# Altium PCB lipo recharging board.PcbDoc
Units mil, origin at the board's own origin, x right, y up, seen from the top; angles counter-clockwise.
Board outline 6000 x 4000 mil, 4 copper layers (Top Layer, Layer 1, Layer 2, Bottom Layer), stack 23.756 mil thick; 67 components, 46 nets, 223 pads, 30 vias.
Unrouted connection lines stored in the file: 2.
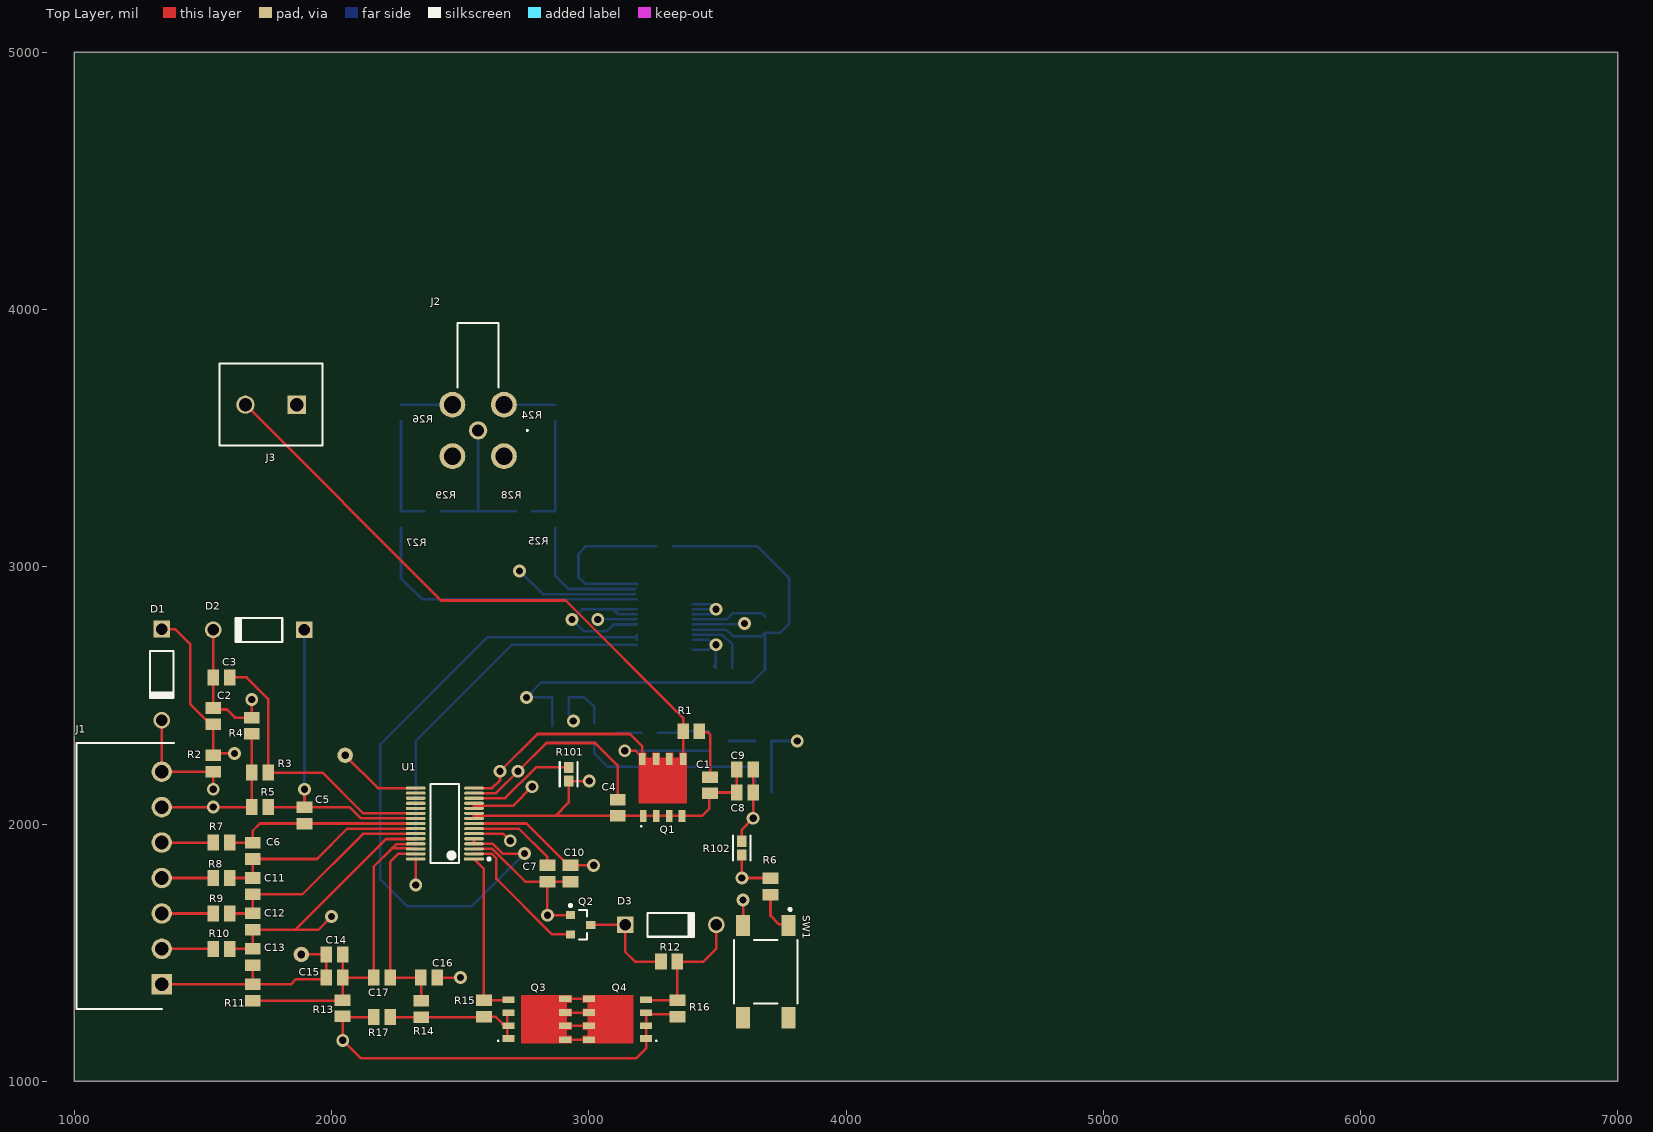
[diagram p0: Top Layer view]
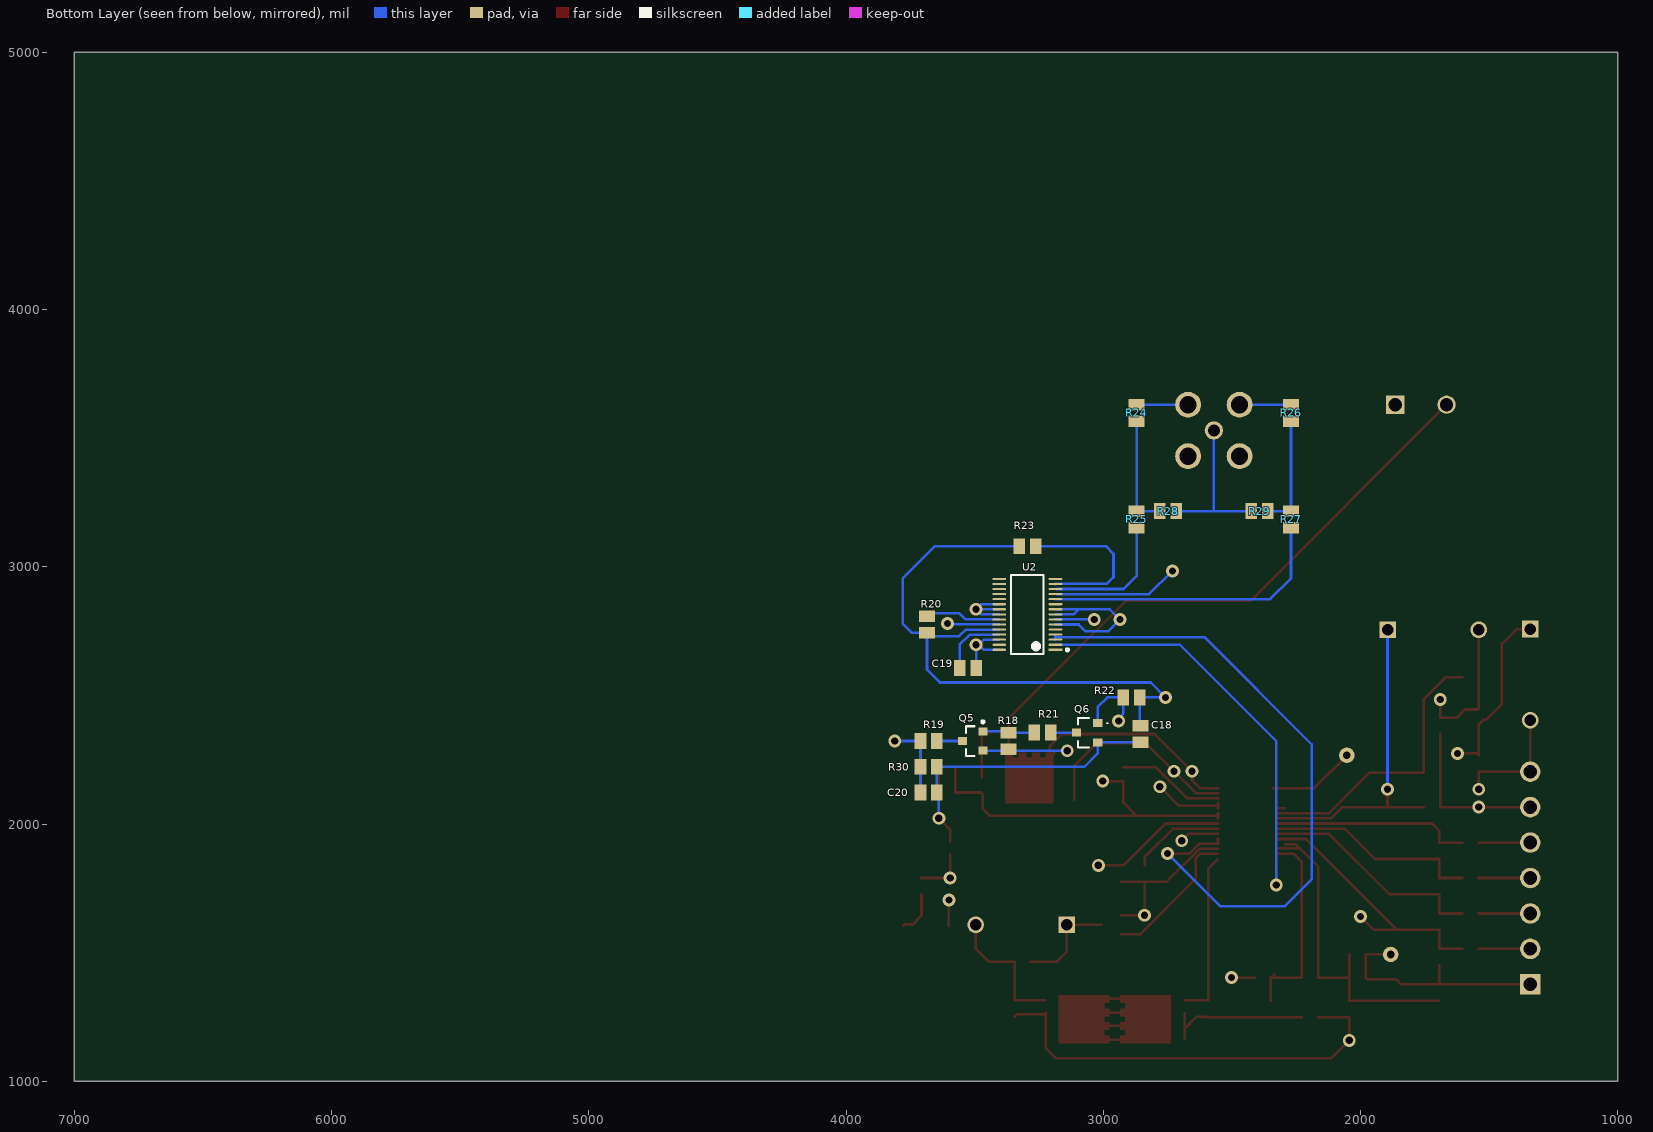
[diagram p1: Bottom Layer view, seen from below]
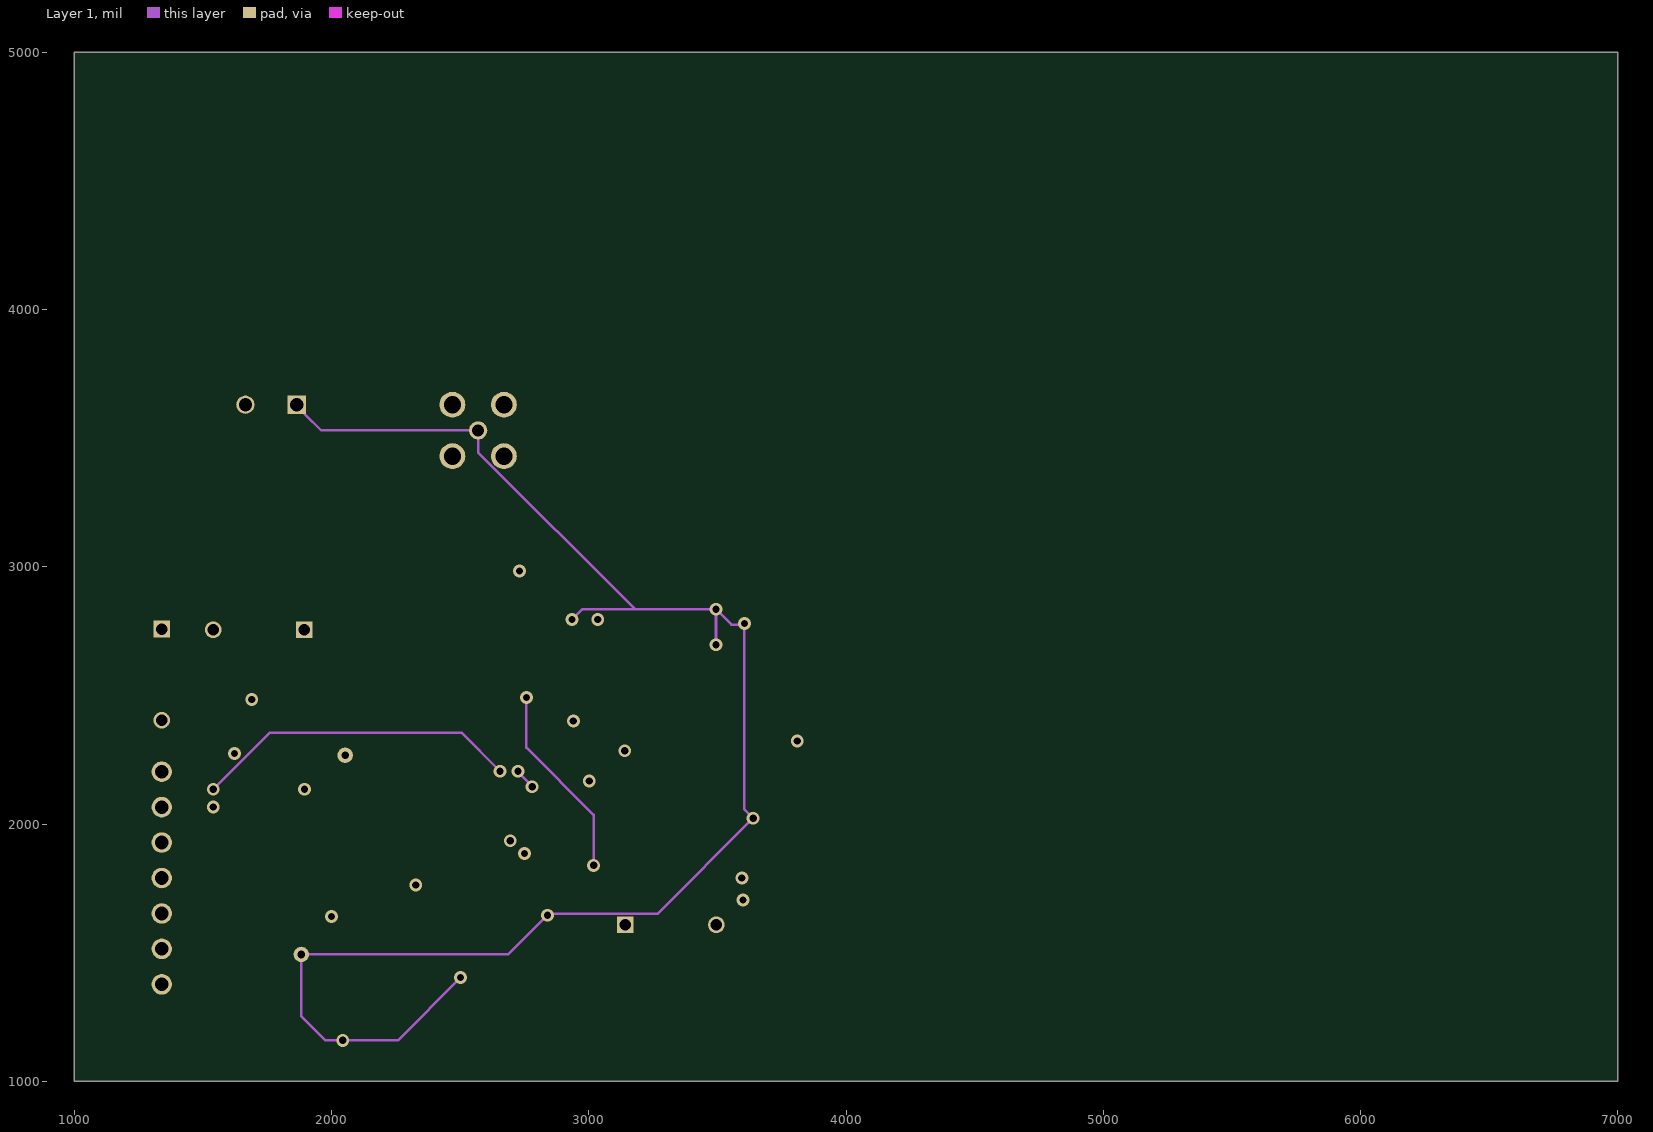
[diagram p2: Layer 1]
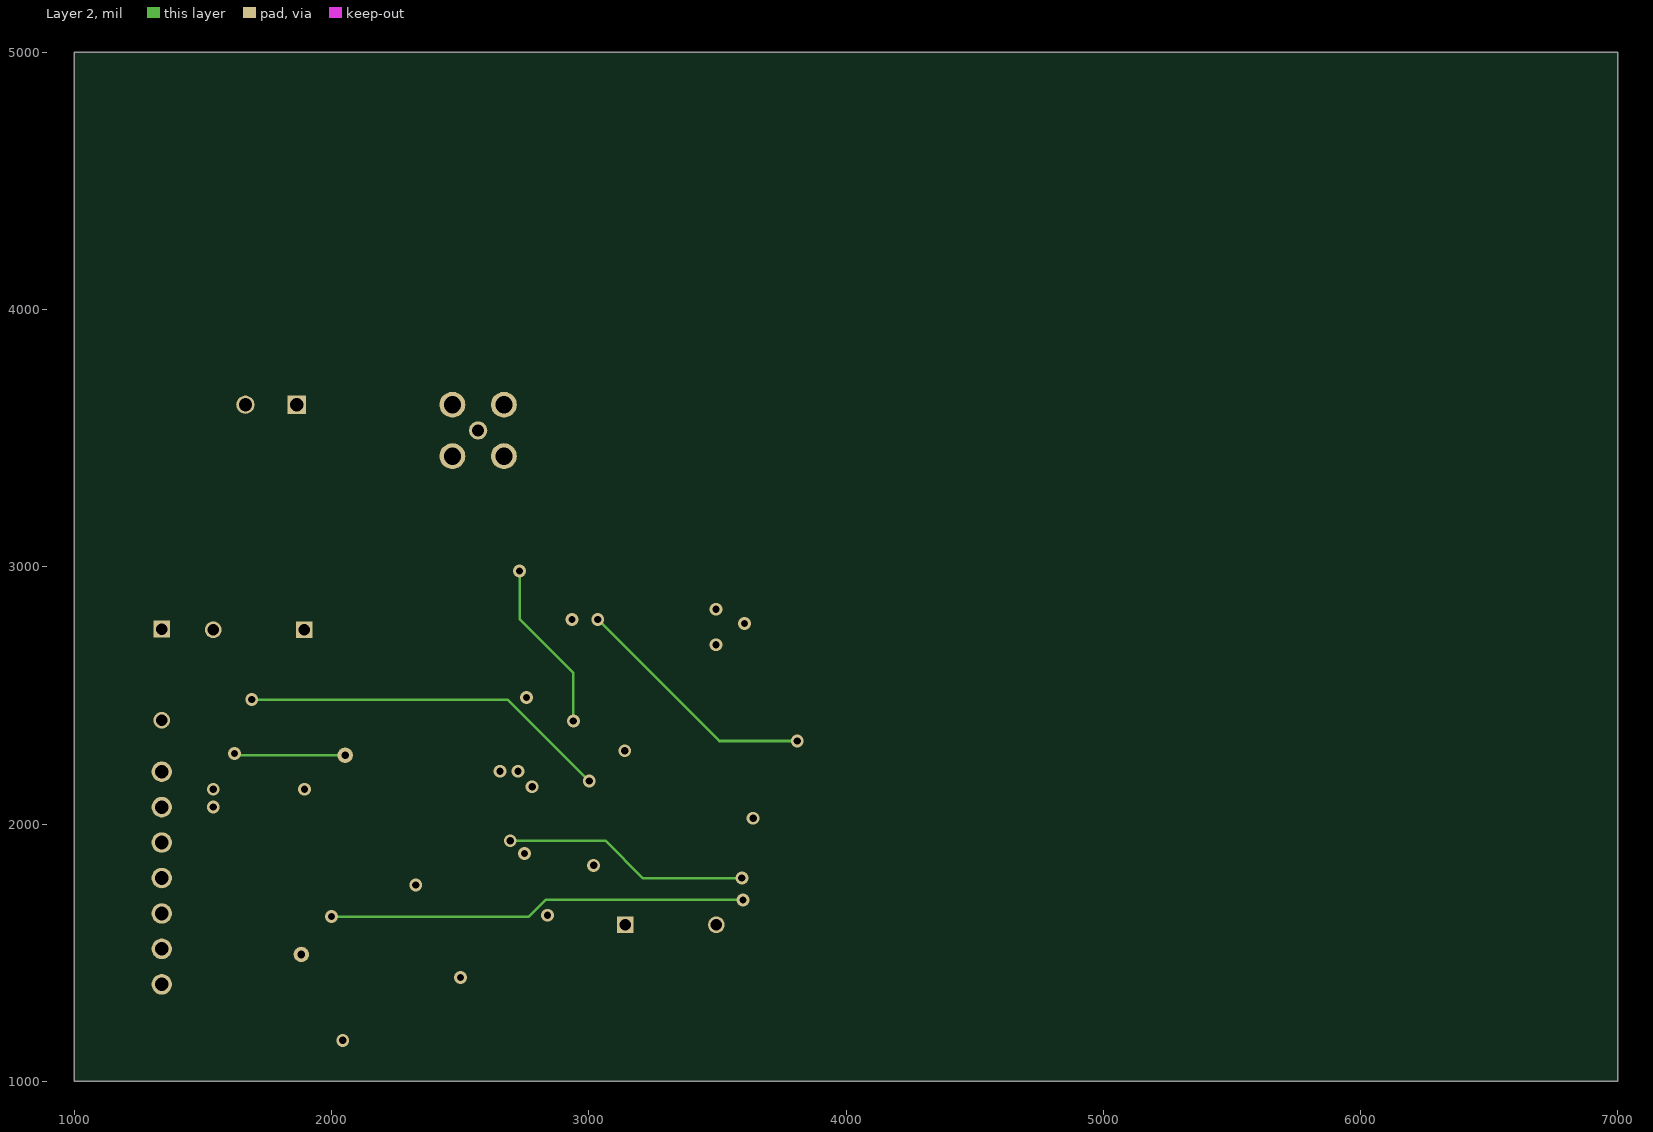
[diagram p3: Layer 2]

## Layer stack, top to bottom
Top Solder: solder mask 0.4, Solder Resist, Dk 3.5
Top Layer: signal copper 1.4
Dielectric 2: prepreg 2.8, PP-006, Dk 4.1
Layer 1: signal copper 1.378
Dielectric 1: dielectric 12.6, FR-4, Dk 4.8
Layer 2: signal copper 1.378
Dielectric 3: prepreg 2.8, PP-006, Dk 4.1
Bottom Layer: signal copper 1.4
Bottom Solder: solder mask 0.4, Solder Resist, Dk 3.5

## Board outline
1000,1000 7000,1000 7000,5000 1000,5000

## Design rules (kind name [scope] priority, off if disabled: settings)
Clearance [All] p1: gap=5 ignorepadtopadclearanceinfootprint=TRUE
PolygonConnect [All] p1: connectstyle=Relief reliefconductorwidth=10 reliefentries=4 polygonreliefangle="90 Angle" airgapwidth=10
RoutingVias [All] p1: holewidth=28 width=50 viastyle="Through Hole" minholewidth=28 minwidth=50 maxholewidth=28 maxwidth=50
SolderMaskExpansion [All] p1: expansion=4 istentingtop=FALSE
Width [All] p1: maxlimit=10 minlimit=10 preferedwidth=10
30 further rules are at their usual default settings.

## Classes and differential pairs
component class "LiPo Recharging Circuit Schematic v.20": C18 C19 C20 J2 Q5 Q6 R18 R19 R20 R21 R22 R23 R24 R25 R26 R27 R28 R29 R30 U2
component class "battery monitor v2.0": C1 C2 C3 C4 C5 C6 C7 C8 C9 C10 C11 C12 C13 C14 C15 C16 C17 D1 D2 D3 D? J1 Q1 Q2 Q3 Q4 R1 R2 R3 R4 R5 R6 R7 R8 R9 R10 R11 R12 R13 R14 R15 R16 R17 RT1 RT2 SW1 U1

## Components (designator, comment, footprint, x,y, rotation, side; value= is the part's Value field where it differs from the comment)
C1 "Capacitor" CAPC2012X145N 3471.56,2150.67 r90 top value=2.2uF
C2 "Capacitor" CAPC2012X145N 1540,2419.06 r270 top value=1uF
C3 "Capacitor" CAPC2012X145N 1571.89,2570 r180 top value=1uF
C4 "Capacitor" CAPC2012X145N 3112.56,2063.23 r90 top value=1uF
C5 "Capacitor" CAPC2012X145N 1895,2033.7 r90 top value=1uF
C6 "Capacitor" CAPC2012X145N 1693.78,1895.91 r90 top value=1uF
C7 "Capacitor" CAPC2012X145N 2839.06,1807.4 r90 top value=1uF
C8 "Capacitor" CAPC2012X145N 3607.23,2122.56 r180 top value=1uF
C9 "Capacitor" CAPC2012X145N 3607.23,2212.56 r180 top value=2.2uF
C10 "Capacitor" CAPC2012X145N 2929.06,1807.4 r90 top value=4.7uF
C11 "Capacitor" CAPC2012X145N 1693.78,1758.11 r90 top value=1uF
C12 "Capacitor" CAPC2012X145N 1693.78,1620.32 r90 top value=1uF
C13 "Capacitor" CAPC2012X145N 1693.78,1482.52 r90 top value=1uF
C14 "Capacitor" CAPC2012X145N 2011.89,1492.83 r180 top value=1uF
C15 "Capacitor" CAPC2012X145N 2011.89,1402.83 r180 top value=0.1uF
C16 "Capacitor" CAPC2012X145N 2379.45,1402.83 r180 top value=0.1uF
C17 "Capacitor" CAPC2012X145N 2195.67,1402.83 r180 top value=0.1uF
C18 "Capacitor" CAPC2012X145N 2855.73,2349.43 r90 bottom value=0.1uF
C19 "Capacitor" CAPC2012X145N 3526.16,2606.89 r0 bottom value=0.1uF
C20 "Capacitor" CAPC2012X145N 3678.49,2122.56 r0 bottom value=3300pF
D1 "1N4001-T" DIOD-DO-41-P-2_V 1340,2580.55 r270 top
D2 "1N4001-T" DIOD-DO-41-P-2_V 1717.17,2754.88 r180 top
D3 "1N4001-T" DIOD-DO-41-P-2_V 3318.77,1608.11 r0 top
J1 "39502-1007" SHDRRA7W80P0X350_1X7_2590X920X730P 1340,1376.61 r90 top
J2 "CONSMB002-G" CONSMB002G 2570,3530 r0 top
J3 "Comment" PHOE-1729128-2_V 1765,3630 r180 top
Q1 "BSC0904NSI" INF-PG-TDSON-8-1_V#1 3287.56,2142.56 r0 top
Q2 "BVSS84LT1G" ONSC-SOT-23-3-318-08_V#1 2968.43,1608.11 r0 top
Q3 "BSC0904NSI" INF-PG-TDSON-8-1_V#2 2798.78,1241.05 r90 top
Q4 "BSC0904NSI" INF-PG-TDSON-8-1_V#1 3111.54,1241.06 r90 top
Q5 "BVSS84LT1G" ONSC-SOT-23-3-318-08_V#2 3507.23,2322.56 r0 bottom
Q6 "SSM3K376R_LF" SSM3K376RLF 3062.74,2354.94 r270 bottom
R1 "Resistor" CAPC2012X145N 3398.45,2360.67 r0 top value=10K
R2 "Resistor" CAPC2012X145N 1540,2235.28 r270 top value=100
R3 "Resistor" CAPC2012X145N 1721.89,2200 r180 top value=100
R4 "Resistor" CAPC2012X145N 1690,2381.89 r90 top value=10K
R5 "Resistor" CAPC2012X145N 1721.89,2065.59 r180 top value=100
R6 "Resistor" CAPC2012X145N 3706.38,1756.89 r90 top value=10K
R7 "Resistor" CAPC2012X145N 1571.89,1927.8 r180 top value=100
R8 "Resistor" CAPC2012X145N 1571.89,1790 r180 top value=100
R9 "Resistor" CAPC2012X145N 1571.89,1652.2 r180 top value=100
R10 "Resistor" CAPC2012X145N 1571.89,1514.41 r180 top value=100
R11 "Resistor" CAPC2012X145N 1693.78,1344.72 r90 top value=100
R12 "Resistor" CAPC2012X145N 3312.72,1465 r180 top value=1M
R13 "Resistor" CAPC2012X145N 2042.56,1283.78 r270 top value=100
R14 "Resistor" CAPC2012X145N 2348.78,1280.94 r270 top value=100
R15 "Resistor" CAPC2012X145N 2592.56,1282.16 r90 top value=1M
R16 "Resistor" CAPC2012X145N 3344.61,1283.11 r90 top value=1M
R17 "Resistor" CAPC2012X145N 2195.67,1249.05 r0 top value=0.001
R18 "Resistor" CAPC2012X145N 3367.86,2323.05 r270 bottom value=100K
R19 "Resistor" CAPC2012X145N 3678.49,2322.56 r180 bottom value=300k
R20 "Resistor" CAPC2012X145N 3685,2775 r270 bottom value=100K
R21 "Resistor" CAPC2012X145N 3235.97,2354.94 r0 bottom value=100K
R22 "Resistor" CAPC2012X145N 2889.51,2492.34 r180 bottom value=1M
R23 "Resistor" CAPC2012X145N 3294.37,3079.61 r0 bottom value=221k
R24 "Resistor" CAPC2012X145N 2870,3598.11 r90 bottom value=100
R25 "Resistor" CAPC2012X145N 2870,3184.33 r90 bottom value=100
R26 "Resistor" CAPC2012X145N 2270,3598.11 r90 bottom value=100
R27 "Resistor" CAPC2012X145N 2270,3184.33 r90 bottom value=100
R28 "Resistor" CAPC2012X145N 2748.11,3216.22 r180 bottom value=1M
R29 "Resistor" CAPC2012X145N 2391.89,3216.22 r180 bottom value=1M
R30 "Resistor" CAPC2012X145N 3678.49,2222.56 r0 bottom value=13.7k
R101 "10k" FP-NCU18-0_15-IPC_B 2921.77,2193.38 r270 top
R102 "10k" FP-NCU18-0_15-IPC_B 3595,1906.62 r270 top
SW1 "4-1437565-1" FP-4-1437565-1-MFG 3688.19,1425.87 r270 top
U1 "BQ7693000DBT" FP-DBT0030A-IPC_A 2440.62,2001.81 r180 top
U2 "BQ78350DBT-R1" FP-DBT0030A-IPC_C 3295,2815 r0 bottom

## Footprints (in the part's own frame and the unit in brackets; to place one, negate y for a bottom-side part, rotate by r counter-clockwise, add the part's x,y. Pads: shape width x height; smd on the part's side, far side on the other; paste and mask are expansions set on the pad)
CAPC2012X145N [mm]
  rect 1.14x1.57 smd: 1(-0.81,0) 2(0.81,0)
CONSMB002G [mm]
  round 1.8 hole 1.2: 1(0,0)
  round 2.55 hole 1.7: 2(2.54,2.54) 3(-2.54,2.54) 4(-2.54,-2.54) 5(2.54,-2.54)
  silkscreen extent -2.03,-0.05 4.9,10.6
DIOD-DO-41-P-2_V [mm] "2-Leads, Axial Lead, Body 4.635x2.36mm, Pin Spacing 9mm"
  rect 1.65x1.65 hole 1.15: 1(-4.5,0)
  round 1.65 hole 1.15: 2(4.5,0)
  silkscreen extent -2.32,-1.18 2.32,1.18, body extent -4.93,-1.18 4.93,1.18, height 2.35
FP-4-1437565-1-MFG [mm]
  rect 2.1x1.38 smd paste+0 mask+0: 1(-4.55,2.24) 2(4.55,2.24) 3(-4.55,-2.24) 4(4.55,-2.24)
  silkscreen extent -6.27,-3.15 3.15,3.15
FP-DBT0030A-IPC_A [mm]
  rect 1.955x0.312 smd paste+0 mask+0: 1(-2.875,3.5)
  rrect100% 1.955x0.312 smd paste+0 mask+0: 2(-2.875,3) 3(-2.875,2.5) 4(-2.875,2) 5(-2.875,1.5) 6(-2.875,1) 7(-2.875,0.5) 8(-2.875,0) 9(-2.875,-0.5) 10(-2.875,-1) 11(-2.875,-1.5) 12(-2.875,-2) 13(-2.875,-2.5) 14(-2.875,-3) 15(-2.875,-3.5) 16(2.875,-3.5) 17(2.875,-3) 18(2.875,-2.5) 19(2.875,-2) 20(2.875,-1.5) 21(2.875,-1) 22(2.875,-0.5) 23(2.875,0) 24(2.875,0.5) 25(2.875,1) 26(2.875,1.5) 27(2.875,2) 28(2.875,2.5) 29(2.875,3) 30(2.875,3.5)
  silkscreen extent -4.48,-3.9 1.4,3.9, body extent -4.35,-4.4 4.35,4.4, height 0.25
FP-DBT0030A-IPC_C [mm]
  rect 1.355x0.212 smd paste+0 mask+0: 1(-2.775,3.5)
  rrect100% 1.355x0.212 smd paste+0 mask+0: 2(-2.775,3) 3(-2.775,2.5) 4(-2.775,2) 5(-2.775,1.5) 6(-2.775,1) 7(-2.775,0.5) 8(-2.775,0) 9(-2.775,-0.5) 10(-2.775,-1) 11(-2.775,-1.5) 12(-2.775,-2) 13(-2.775,-2.5) 14(-2.775,-3) 15(-2.775,-3.5) 16(2.775,-3.5) 17(2.775,-3) 18(2.775,-2.5) 19(2.775,-2) 20(2.775,-1.5) 21(2.775,-1) 22(2.775,-0.5) 23(2.775,0) 24(2.775,0.5) 25(2.775,1) 26(2.775,1.5) 27(2.775,2) 28(2.775,2.5) 29(2.775,3) 30(2.775,3.5)
  silkscreen extent -4.08,-3.9 1.6,3.9, body extent -3.21,-3.9 3.21,3.9, height 1.2
FP-NCU18-0_15-IPC_B [mil]
  rect 43.55x37.73 smd paste+0 mask+0: 1(-26.62,0) 2(26.62,0)
  silkscreen extent -48,-35 48,35, body extent -58,-29 58,29, height 10
INF-PG-TDSON-8-1_V#1 [mm] "TDSON, 8-Leads, Body 6.15x5.15mm, Pitch 1.27mm"
  rect 0.65x1.2 smd: 1(-1.905,-2.825) 2(-0.635,-2.825) 3(0.635,-2.825) 4(1.905,-2.825) 5(2.007,2.794) 6(0.66,2.794) 7(-0.66,2.794) 8(-2.007,2.794)
  Top Layer region: -2.35,2.925 -2.35,-1.575 2.35,-1.575 2.35,2.925
  Top Layer region: -2.35,2.925 -1.65,2.925 -1.65,3.425 -2.35,3.425
  Top Layer region: 1.65,2.925 2.35,2.925 2.35,3.425 1.65,3.425
  Top Layer region: -1.015,2.925 -0.315,2.925 -0.315,3.425 -1.015,3.425
  Top Layer region: 0.315,2.925 1.015,2.925 1.015,3.425 0.315,3.425
  silkscreen extent -2.23,-3.94 -2.03,-3.74, body extent -2.58,-3.08 2.58,3.08, height 1
INF-PG-TDSON-8-1_V#2 [mm] "TDSON, 8-Leads, Body 6.15x5.15mm, Pitch 1.27mm"
  rect 0.65x1.2 smd: 1(-1.905,2.825) 2(-0.635,2.825) 3(0.635,2.825) 4(1.905,2.825) 5(2.007,-2.794) 6(0.66,-2.794) 7(-0.66,-2.794) 8(-2.007,-2.794)
  Top Layer region: 0.315,-2.925 1.015,-2.925 1.015,-3.425 0.315,-3.425
  Top Layer region: -1.015,-2.925 -0.315,-2.925 -0.315,-3.425 -1.015,-3.425
  Top Layer region: 1.65,-2.925 2.35,-2.925 2.35,-3.425 1.65,-3.425
  Top Layer region: -2.35,-2.925 -1.65,-2.925 -1.65,-3.425 -2.35,-3.425
  Top Layer region: -2.35,-2.925 -2.35,1.575 2.35,1.575 2.35,-2.925
  silkscreen extent -2.23,3.74 -2.03,3.94, body extent -2.58,-3.08 2.58,3.08, height 1
ONSC-SOT-23-3-318-08_V#1 [mm] "SOT23, 3-Leads, Body 2.92x1.3mm, Pitch 0.95mm"
  rect 0.9x0.8 smd: 1(-1,0.95) 2(-1,-0.95) 3(1,0)
  silkscreen extent -1.12,-1.46 0.65,2.02, body extent -0.65,-1.46 0.65,1.46, height 1.11
ONSC-SOT-23-3-318-08_V#2 [mm] "SOT23, 3-Leads, Body 2.92x1.3mm, Pitch 0.95mm"
  rect 0.9x0.8 smd: 1(-1,-0.95) 2(-1,0.95) 3(1,0)
  silkscreen extent -1.12,-2.02 0.65,1.46, body extent -0.65,-1.46 0.65,1.46, height 1.11
PHOE-1729128-2_V [mm] "Receptacle, 2-Leads, Body 8.1x10.16mm, Pitch 5.08mm"
  rect 1.8x1.8 hole 1.3: 1(-2.54,0)
  round 1.8 hole 1.3: 2(2.54,0)
  silkscreen extent -5.08,-4.05 5.08,4.05, body extent -5.65,-4.05 5.08,4.05, height 10.01
SHDRRA7W80P0X350_1X7_2590X920X730P [mm]
  rect 2.025x2.025 / inner round 2.025 / far side rect 2.025x2.025 hole 1.35: 1(0,0)
  round 2.025 hole 1.35: 2(3.5,0) 3(7,0) 4(10.5,0) 5(14,0) 6(17.5,0) 7(21,0)
  silkscreen extent -2.45,-1.2 23.85,8.4
SSM3K376RLF [mm]
  rect 0.8x0.9 smd: 1(-0.95,1.05) 2(0.95,1.05) 3(0,-1.05)
  silkscreen extent -1.45,-0.9 1.45,2.05

## Part data
D1 D2 D3: library part CMP-0639-00006-2, "1.0 A Rectifier, 15 pF, 50 V, -65 to 150 degC, 2-Pin DO-41 Plastic, RoHS, Tape and Reel", Manufacturer="Diodes Inc", Max. Average Rectified Current IO (A)=1, Operating Temperature Range (degC)="-65 to 150", ComponentLink1Description="Manufacturer URL", ComponentLink1URL=http://diodes.com/, ComponentLink2Description=Datasheet, ComponentLink2URL=http://diodes.com/datasheets/ds28002.pdf, CT (pF)=15, DatasheetVersion="Rev. 8-2", Max. IFSM (A)=30, Max. IR (uA)=5, Mounting Technology="Through Hole", PackageDescription="2-Pin Axial Lead, Body 4.635 x 2.36 mm, Lead Spread 25.4 mm", PackageReference=DO-41-P-2, Packing="Tape and Reel", PartNumber=1N4001-T, RoHS=TRUE, VF (V)=1, VRRM (V)=50
J1: "Pluggable Terminal Blocks 3.5MM HOR PCB HDR 7 CIRCUITS", Manufacturer_Name=Molex, Mouser Part Number=538-39502-1007, Datasheet Link=https://www.molex.com/pdm_docs/sd/395021007_sd.pdf, Geometry.Height=7.3mm, Manufacturer_Part_Number=39502-1007, Mouser Price/Stock=https://www.mouser.co.uk/ProductDetail/Molex/39502-1007?qs=haJlXwgIYR0hhSR3z4BP8g%3D%3D
J2: "RF Connectors / Coaxial Connectors SMB Connector Jack, Male Pin 50Ohm Through Hole, Right Angle Solder", Manufacturer_Name="Linx Technologies", Mouser Part Number=712-CONSMB002-G, Datasheet Link=https://www.mouser.de/datasheet/2/238/consmb002_g_ds-1929631.pdf, Geometry.Height=9.06mm, Manufacturer_Part_Number=CONSMB002-G, Mouser Price/Stock=https://www.mouser.co.uk/ProductDetail/Linx-Technologies/CONSMB002-G?qs=81r%252BiQLm7BTBSU%252Bp%2F%252BRRfQ%3D%3D
Q1 Q3 Q4: library part CMP-1090-00063-1, "N-Channel OptiMOS Power-MOSFET, 30 V VDS, 78 A ID, -55 to 150 degC, PG-TDSON-8-1, Reel, Green", Manufacturer=Infineon, ComponentLink1Description="Manufacturer URL", ComponentLink1URL=http://www.infineon.com/, ComponentLink2Description=Datasheet, ComponentLink2URL=http://www.infineon.com/dgdl/BSC0904NSI_Rev+2.2.pdf?folderId=db3a304313b8b5a60113cee8763b02d7&fileId=db3a30432f29829e012f3073397339ef, ComponentLink3Description="Package Specification", ComponentLink3URL=http://www.infineon.com/cms/packages/SMD_-_Surface_Mounted_Devices/P-PG-TDSON/P-PG-TDSON-08-01x_2x_3.html?__locale=en, DatasheetVersion="Rev. 2.2", Green=TRUE, Halogen-free=TRUE, ID (max)="78Â A", IDpuls (max)="312Â A", Mounting Technology="Surface Mount", PackageDescription="8-Pin Plastic (Green) Thin Dual Small Outline Non-Leaded Package, 5.15 x 5.9 mm Body, 1.27 mm Pitch", PackageReference=PG-TDSON-8-1, Packing=Reel, PartNumber=BSC0904NSI, Polarity=N, Ptot (max)="37Â W", QG="17Â nC", RDS (on) (max)="3.7Â mOhm", RDS (on) (max) (@4.5V)="5.2Â mOhm", Rth="3.4Â K/W", RthJA (max)="50Â K/W", RthJC (max)="3.4Â K/W", VDS (max)="30Â V", VGS(th) (max)="2.2Â V", VGS(th) (min)="1Â V"
Q2 Q5: library part CMP-1058-00764-1, "Power MOSFET Single P-Channel, -50 V, 10 Ohm, 3-Pin SOT-23, Pb-Free, Tape and Reel", Manufacturer="On Semiconductor", Package Type=SOT-23-3, Channel Polarity="P Channel", Ciss Typ (pF)=36, ComponentLink1Description="Manufacturer URL", ComponentLink1URL=http://www.onsemi.com/, ComponentLink2Description=Datasheet, ComponentLink2URL=http://www.onsemi.com/pub_link/Collateral/BSS84LT1-D.PDF, ComponentLink3Description="Package Specification", ComponentLink3URL=http://www.onsemi.cn/pub_link/Collateral/318-08.PDF, Configuration=Single, Coss Typ (pF)=17, Crss Typ (pF)=6.5, DatasheetVersion="Rev. 8", ID Max (A)=0.13, Mounting Technology="Surface Mount", PackageDescription="3-Pin Small Outline Transistor, Body 2.92 x 1.3 mm, Pitch 0.95 mm", PackageReference=SOT-23-3-318-08, PackageVersion="Rev. AP, 11/2009", Packing="Tape and Reel", PartNumber=BVSS84LT1G, PD Max (W)=0.225, RoHS=Pb-Free, V(BR)DSS Min (V)=50, VGS Max (V)=20, VGS(th) Max (V)=2
Q6: "Trans MOSFET N-CH Si 30V 4A Automotive 3-Pin SOT-23F T/R", Manufacturer_Name=Toshiba, Manufacturer_Part_Number=SSM3K376R,LF, Mouser Part Number=757-SSM3K376RLF, Datasheet Link=https://toshiba.semicon-storage.com/info/docget.jsp?did=60463&prodName=SSM3K376R, Geometry.Height=0.88mm, Mouser Price/Stock=https://www.mouser.co.uk/ProductDetail/Toshiba/SSM3K376RLF?qs=wUXugUrL1qxQI6AhpkM3mw%3D%3D
R101 R102: library part CMP-06022-000547-2, "THERMISTOR NTC", Case Code (Imperial)=0603, Case Code (Metric)=1608, Max Operating Temperature=150°C, Min Operating Temperature=-40°C, Case/Package=0603, REACH SVHC="No SVHC", RoHS Compliant=Yes
SW1: library part CMP-03407-000003-1, "SWITCH TACTILE SPST-NO 0.05A 24V", Contact Current Rating=50mA, Contact Resistance=100mΩ, Manufacturer="TE Connectivity", Operating Force=160gf, Package=0, Temperature="-35°C to +85°C", Temperature Range High=+85°C, Temperature Range Low=-35°C, Voltage Rating Dc=24V, Automotive=No, Category=Switch, Ciiva Ids=2672442, ComponentLink2Description=Datasheet, ComponentLink2URL=https://www.te.com/commerce/DocumentDelivery/DDEController?Action=showdoc&DocId=Customer+Drawing%7F2-1437565-7%7FV%7Fpdf%7FEnglish%7FENG_CD_2-1437565-7_V.pdf%7F4-1437565-1, Device Class L1=Electromechanical, Device Class L2=Switches, Device Class L3="Tactile Switches", Digikey Description="SWITCH TACTILE SPST-NO 0.05A 24V", Electromechanical Life=100000Cycles, Height=5.38mm, Import Ts=1521848451, Lead Free=Yes, Manufacturer Part Number=4-1437565-1, Mount="Surface Mount", Mouser Description="Switch Tactile OFF (ON) SPST Round Button Gull Wing 0.05A 12VDC 1.57N SMD Loose Piece", Octopart=https://octopart.com/fsm4jsma-te+connectivity-55488004, Release Date=1503379960, RoHS=TRUE, Standoff Height=0.05mm, Throw Configuration=SPST-NO
U1: library part CMP-04911-000035-1, "IC BATT MGMT LI-ION AFE 30TSSOP", Case/Package=TSSOP, Max Operating Temperature=85°C, Min Operating Temperature=-40°C, Operating Supply Voltage=25V, Output Voltage=3.6V, Package Quantity=60, Contact Plating=Gold, Fault Protection="Over Current", Interface=I2C, Lead Free="Lead Free", Mount="Surface Mount", Number of Pins=30, Packaging=Rail/Tube, RoHS Compliant=Yes, Weight=0.003439oz
U2: library part CMP-04911-000039-1, "IC BATTERY MGMT CTRLR 30TSSOP", Case/Package=TSSOP, Max Operating Temperature=85°C, Max Supply Voltage=2.6V, Min Operating Temperature=-40°C, Min Supply Voltage=2.4V, Output Voltage=5.5V, Contact Plating=Gold, Fault Protection="Over Current", Interface=SMBus, Lead Free="Lead Free", Mount="Surface Mount", Number of Pins=30, Packaging=Rail/Tube, REACH SVHC="No SVHC", RoHS Compliant=Yes
C1 C2 C3 C4 C5 C6 C7 C8 C9 C10 C11 C12 C13 C14 C15 C16 C17 C18 C19 C20: SimulationGenericComponent=True
R1 R2 R3 R4 R5 R6 R7 R8 R9 R10 R11 R12 R13 R14 R15 R16 R17 R18 R19 R20 R21 R22 R23 R24 R25 R26 R27 R28 R29 R30: SimulationGenericComponent=True, TC1=0, TC2=0

## Free pads (board coordinates)
  round 60 hole 30: 2(2052.83,2267.17) 3(1882.52,1492.83)

## Via types
v1: diameter 50, hole 28, Top Layer to Bottom Layer, 30 vias

## Nets (pads, with @x,y where several pads share a name; then routed paths per layer and width w, separated by ;. In a path a pad name is that pad's centre, name@x,y a point inside that pad or via, vN(x,y) a via of type N, cw(c..) or ccw(c..) an arc to the next point about the centre after c; other vN are vias at no path point)
A: J1.6 R3.2 R4.1 R5.2 | length 634.4
  Top Layer w10: J1.6 v1(1540,2065.59) R5.2 R3.2 R4.1
GND: C7.1 C8.1 C9.1 C10.1 C13.1 C14.2 C15.2 C16.1 C18.1 C19.1 C20.1 J1.1 J2.1 J3.1 pad.3 Q2.1 Q4.1 Q4.2 Q4.3 Q6.2 R11.2 R13.2 R16.1 R17.1 R28.2 R29.1 R30.1 R102.1 U1.3 U2.6 U2.8 U2.9 U2.21 U2.22 U2.23 U2.25 U2.28 U2.30 | length 13042.8
  Top Layer w10: J1.1 R11.2 ; C13.1 R11.2 ; pad.3 C14.2@1972.52,1492.83 ; C14.2 C15.2 1972.86,1395.7 1860.7,1395.7 1841.61,1376.61 R11.2 ; R17.1 2043.78,1249.05 v1(2043.78,1159.05) 2112.83,1090 3185,1090 3222.76,1127.76 Q4.1 Q4.2 Q4.3 3228.81,1260 3335.83,1260 R16.1 ; C16.1 v1(2501.34,1402.83) ; U1.3 2625.4,1903.39 2753.28,1775.51 C7.1 ; Q2.1 v1(2839.06,1645.51) C7.1 ; C10.1 C7.1 ; R102.1 3595,1978.44 v1(3639.12,2022.56) C8.1 C9.1
  Layer 1 w10: J3.1@1860,3630 J3.1 1895.43,3599.57 1895.43,3594.57 1960,3530 J2.1 2570,3444.87 3179.87,2835 ; v1(2501.34,1402.83) 2257.56,1159.05 v1(2043.78,1159.05) 1975.95,1159.05 1882.52,1252.48 pad.3 2686.38,1492.83 v1(2839.06,1645.51) 2844.13,1650.59 3267.15,1650.59 v1(3639.12,2022.56) 3605,2056.68 v1(3605,2780) 3600,2775 3555,2775 v1(3495,2835) ; v1(2935,2795) 2975,2835 3179.87,2835 ; v1(3494.27,2696.89) 3494.63,2697.26 3494.63,2834.63 v1(3495,2835) ; 3179.87,2835 v1(3495,2835)
  Bottom Layer w10: R29.1 2570,3216.22 ; J2.1 2570,3216.22 ; R28.2 2570,3216.22 ; C18.1 Q6.2 ; Q6.2@3034.12,2306.79 3023.37,2317.54 Q6.2 ; U2.6 3095.63,2775.63 3070,2750 2980,2750 v1(2935,2795) 2974.68,2834.68 3095.32,2834.68 ; U2.8 3115,2815 3095.32,2834.68 ; U2.9 3095.32,2834.68 ; U2.30 3463.76,2677.2 v1@3483.44,2696.89 ; U2.28 3463.76,2716.57 v1@3483.44,2696.89 ; U2.25 3405.08,2776.45 3601.45,2776.45 v1(3605,2780) ; U2.23 3475,2815 v1@3494.68,2834.68 ; U2.22 v1@3494.68,2834.68 ; U2.21 3475.63,2854.37 v1(3495,2835) v1@3494.68,2834.68 ; C19.1@3486.16,2615 C19.1 v1(3494.27,2696.89) v1@3483.44,2696.89 ; v1(3639.12,2022.56) C20.1@3639.12,2122.56 ; C20.1 R30.1 3073.25,2222.56 3021.4,2274.41 Q6.2
NetC1_1: C1.1 C2.1 C3.2 C4.1 C8.2 C9.2 D2.2 Q1.1 Q1.2 Q1.3 Q1.4 R4.2 R101.2 U1.9 U1.10 | length 3421.2
  Top Layer w10: D2.2 C3.2 C2.1 1545.95,2445 1593.64,2445 1624.86,2413.78 R4.2 v1(1690,2483.78) ; U1.9 2553.82,2031.34 ; U1.10 2553.82,2031.34 ; v1(3001.77,2166.77) R101.2 2921.77,2083.1 2870,2031.34 ; C9.2 C8.2 3475.34,2122.56 C1.1 3468.78,2116 3468.78,2059.78 3440.34,2031.34 Q1.4 Q1.3 Q1.2 Q1.1 C4.1 2870,2031.34 ; 2553.82,2031.34 2870,2031.34
  Layer 2 w10: v1(1690,2483.78) 2684.75,2483.78 v1(3001.77,2166.77)
NetC1_2: C1.2 D1.2 J1.7 J3.2 Q1.5 Q1.6 Q1.7 Q1.8 Q5.2 R1.1 R1.2 R2.2 R18.2 U1.15 | length 5548.5
  Top Layer w10: D1.2 J1.7 R2.2 v1(1540,2135) ; J3.2 2426.03,2868.97 2910.53,2868.97 3366.56,2412.94 R1.1 Q1.5 ; U1.15 2624.61,2139.61 2655,2170 v1(2655,2205) 2800,2350 3160,2350 3208.56,2301.44 Q1.8@3208.56,2263.39 ; v1(3140,2285) 3181.28,2285 3195.09,2271.18 3200.76,2271.18 Q1.8@3208.56,2263.39 ; Q1.8@3208.56,2257.72 Q1.8@3208.56,2263.39 ; R1.2 3434.24,2356.76 3462.35,2356.76 3471.56,2347.56 C1.2
  Layer 1 w10: v1(1540,2135) 1760,2355 2505,2355 v1(2655,2205)
  Bottom Layer w10: v1(3140,2285) 3361.7,2285 R18.2 ; R18.2@3367.86,2285.16 Q5.2
NetC2_2: C2.2 D1.1 pad.2 R2.1 U1.16 | length 1500.9
  Top Layer w10: D1.1 1392.28,2757.72 1450,2700 1450,2466.39 1511.78,2404.61 1522.56,2404.61 C2.2 R2.1 1547.2,2274.37 v1(1622.8,2274.37) ; pad.2 2180.39,2139.61 U1.16@2338.78,2139.61 ; 2294.45,2060.87 2327.42,2060.87
  Layer 2 w10: v1(1622.8,2274.37) 1630,2267.17 pad.2
NetC3_1: C3.1 R3.1 U1.21 | length 1110.1
  Top Layer w10: C3.1 1670,2570 1753.78,2486.22 R3.1 1964.25,2200 2122.44,2041.81 U1.21@2327.42,2041.81
NetC4_2: C4.2 U1.11 U1.12 U1.14 | length 1167.5
  Top Layer w10: U1.11 2553.82,2070.71 ; U1.12 2553.82,2070.71 ; U1.14 2639.92,2119.92 v1(2725,2205) 2835,2315 3025,2315 3112.56,2227.44 C4.2 ; v1(2780,2145) 2705.71,2070.71 2553.82,2070.71
  Layer 1 w10: v1(2725,2205) 2725,2202.5 2780,2147.5 v1(2780,2145)
NetC5_1: C5.1 C6.2 R7.1 U1.23 | length 781.2
  Top Layer w10: R7.1 C6.2 1693.78,1973.78 1721.81,2001.81 1873.78,2001.81 U1.23
NetC5_2: C5.2 D2.1 R5.1 U1.22 | length 1281.3
  Top Layer w10: R5.1 1873.78,2065.59 1876.89,2065.59 C5.2 ; v1(1895,2135) C5.2 ; U1.22@2327.42,2021.81 2114.16,2021.81 2070.38,2065.59 C5.2
  Bottom Layer w10: D2.1 1895,2754.21 v1(1895,2135)
NetC6_1: C6.1 C11.2 R8.1 U1.24 | length 846.4
  Top Layer w10: R8.1 C11.2 C6.1 1943.37,1864.02 2061.16,1981.81 U1.24@2327.42,1981.81
NetC7_2: C7.2 U1.7 | length 362.9
  Top Layer w10: U1.7 2727.87,1982.13 2839.06,1870.94 C7.2
NetC10_2: C10.2 C18.2 R20.2 R22.2 R23.2 U1.8 U2.26 | length 3707.5
  Top Layer w10: U1.8 2758.07,2001.81 2920.59,1839.29 C10.2 v1(3019.06,1839.29)
  Layer 1 w10: v1(2757.62,2492.34) 2757.62,2296.53 3019.06,2035.1 v1(3019.06,1839.29)
  Bottom Layer w10: C18.2@2857.62,2381.31 R22.2 v1(2757.62,2492.34) 2815.28,2550 3635,2550 3685,2600 R20.2 ; R23.2 3655.39,3079.61 3780,2955 3780,2780 3743.11,2743.11 R20.2 ; U2.26 3534.06,2755.94 3560,2730 3671.89,2730 R20.2
NetC11_1: C11.1 C12.2 R9.1 U1.25 | length 895.2
  Top Layer w10: R9.1 C12.2 C11.1 1886.22,1726.22 2121.81,1961.81 U1.25@2327.42,1961.81
NetC12_1: C12.1 C13.2 R10.1 SW1.3 U1.26 | length 2833.9
  Top Layer w10: R10.1 C13.2 C12.1 1858.43,1588.43 ; v1(2000,1640) 1948.43,1588.43 1858.43,1588.43 ; U1.26@2327.42,1941.81 2211.81,1941.81 1858.43,1588.43 ; SW1.3 v1(3600,1705)
  Layer 2 w10: v1(2000,1640) 2767.5,1640 2832.5,1705 v1(3600,1705)
NetC14_1: C14.1 C15.1 C17.2 R11.1 R13.1 U1.27 U1.28 | length 1330.4
  Top Layer w10: R11.1 2043.78,1312.83 C15.1 ; C14.1 C15.1 ; U1.27@2291.79,1921.81 2251.81,1921.81 2235,1905 ; U1.28@2320,1905 2235,1905 ; C15.1 C17.2 2163.78,1833.78 2235,1905
NetC16_2: C16.2 C17.1 R14.1 U1.29 | length 791.3
  Top Layer w10: U1.29 2326.12,1885 2260,1885 2227.56,1852.56 C17.1 C16.2 C16.2@2335,1415.39 ; R14.1 C16.2@2348.78,1402.83
NetC19_2: C19.2 U2.27 | length 260.1
  Bottom Layer w10: U2.27 3518.74,2736.26 3558.05,2696.95 C19.2
NetC20_2: C20.2 R19.1 R30.2 U2.7 | length 1421.9
  Layer 2 w10: v1(3035,2795) 3507.44,2322.56 v1(3810.38,2322.56)
  Bottom Layer w10: v1(3035,2795) 3035.16,2795.16 3185.58,2795.16 U2.7 ; C20.2 R30.2 R19.1 v1(3810.38,2322.56)
NetD3_1: D3.1 Q2.3 R12.2 | length 393.6
  Top Layer w10: Q2.3 D3.1 3141.6,1503.4 3180,1465 R12.2
NetD3_2: D3.2 Q4.4 R12.1 R16.2 | length 535
  Top Layer w10: Q4.4@3224.61,1315 R16.2 R12.1 3445.66,1465 3495.93,1515.28 D3.2
NetJ1_2: J1.2 R10.2 | length 200
  Top Layer w10: J1.2 R10.2
NetJ1_3: J1.3 R9.2 | length 200
  Top Layer w10: J1.3 R9.2
NetJ1_4: J1.4 R8.2 | length 200
  Top Layer w10: J1.4 R8.2
NetJ1_5: J1.5 R7.2 | length 200
  Top Layer w10: J1.5 R7.2
NetJ2_2: J2.2 R24.2 | length 200
  Bottom Layer w10: J2.2 R24.2
NetJ2_3: J2.3 R26.2 | length 200
  Bottom Layer w10: R26.2 J2.3
NetQ2_2: Q2.2 U1.2 | length 550.4
  Top Layer w10: U1.2@2554.89,1883.7 2623.87,1883.7 2640.86,1866.72 2640.86,1787.14 2857.29,1570.71 Q2.2
NetQ3_1: Q3.1 Q3.2 Q3.3 R14.2 R15.1 R17.2 | length 578
  Top Layer w10: R17.2 R14.2 R15.1@2598.78,1249.05 ; R15.1 2638.46,1250.28 2663.94,1224.8 2663.94,1221.85 2671.73,1214.05 Q3.2@2682.56,1214.05 ; Q3.1@2682.56,1164.05 Q3.2@2682.56,1214.05 ; Q3.3@2682.56,1264.05 Q3.2@2682.56,1214.05
NetQ3_4: Q3.4 R15.2 U1.1 | length 652.3
  Top Layer w10: U1.1@2556.42,1861.42 2592.56,1825.28 R15.2 Q3.4@2682.56,1314.05
NetQ3_5: Q3.5 Q3.6 Q3.7 Q3.8 Q4.5 Q4.6 Q4.7 Q4.8 | length 371
  Top Layer w10: Q3.8 Q4.8 ; Q3.7 Q4.7 ; Q3.6 Q4.6 ; Q3.5 Q4.5
NetQ4_1: 
NetQ5_1: Q5.1 R18.1 R21.2 | length 200
  Bottom Layer w10: R21.2 R18.1 ; R18.1@3367.86,2359.96 Q5.1
NetQ5_3: Q5.3 R19.2 | length 100
  Bottom Layer w10: Q5.3 R19.2
NetQ6_1: Q6.1 R22.1 U2.12 | length 1435.3
  Layer 2 w10: v1(2731.26,2983.74) 2731.26,2796.24 2940,2587.5 v1(2940,2400)
  Bottom Layer w10: v1(2731.26,2983.74) 2821.26,2893.74 U2.12@3181.26,2893.74 ; v1(2940,2400) 2940,2410.82 2921.4,2429.42 R22.1 2983.47,2492.34 3021.4,2454.41 Q6.1
NetQ6_3: Q6.3 R21.1 | length 100
  Bottom Layer w10: Q6.3 R21.1
NetR6_1: R6.1 SW1.1 | length 167.4
  Top Layer w10: R6.1 3706.38,1643.62 3740.07,1609.93 3771.45,1609.93 SW1.1
NetR6_2: R6.2 R102.2 U1.6 | length 1315.5
  Top Layer w10: U1.6 2665.87,1962.44 2693.31,1935 v1(2695,1935) ; R102.2 v1(3595,1790) 3705.16,1790 R6.2
  Layer 1 w10: v1@3593.78,1788.78 v1(3595,1790)
  Layer 2 w10: v1(2695,1935) 3064.42,1935 3210.64,1788.78 v1@3593.78,1788.78
NetR20_1: R20.1 U2.24 | length 296.4
  Bottom Layer w10: U2.24 3535.32,2795.32 3560,2820 3671.89,2820 R20.1
NetR23_1: R23.1 U2.14 | length 641.8
  Bottom Layer w10: 2990,3079.61 R23.1 ; 2990,3080 2960,3050 2960,2960 2986.57,2933.43 3185.42,2933.43 U2.14
NetR24_1: R24.1 R25.2 R28.1 | length 440
  Bottom Layer w10: R28.1 R25.2 R24.1
NetR25_1: R25.1 U2.13 | length 519.1
  Bottom Layer w10: R25.1 2870,2965 2921.57,2913.43 U2.13@3180.31,2913.43
NetR26_1: R26.1 R27.2 R29.2 | length 440
  Bottom Layer w10: R26.1 R27.2 R29.2
NetR27_1: R27.1 U2.11 | length 1146.7
  Bottom Layer w10: R27.1 2270,2955 2350.95,2874.06 U2.11
NetR101_1: R101.1 U1.13 | length 417.5
  Top Layer w10: U1.13 2675.24,2100.24 2795,2220 R101.1
NetU1_4: U1.4 U1.5 U2.3 U2.4 | length 2632.9
  Top Layer w10: U1.5 U1.4 2626.93,1923.07 2665,1885 v1(2750,1885)
  Bottom Layer w10: v1(2750,1885) 2545,1680 2295,1680 2190,1785 2190,2310 2606.42,2726.42 3185.73,2726.42 ; U2.3 3185.73,2726.42 ; U2.4 3185.73,2726.42
NetU1_30: U1.30 U2.2 | length 1674.7
  Top Layer w10: v1(2327.42,1762.58) U1.30
  Bottom Layer w10: v1(2327.42,1762.58) 2327.42,2322.42 2701.89,2696.89 U2.2
pads on no net: J2.4 J2.5 SW1.2 SW1.4 U1.17 U1.18 U1.19 U1.20 U2.1 U2.5 U2.10 U2.15 U2.16 U2.17 U2.18 U2.19 U2.20 U2.29